# Altium PCB Atemgea_pcb.PcbDoc (part 1 of 2)
Units mm, origin at the board's own origin, x right, y up, seen from the top; angles counter-clockwise.
Board outline 68.58 x 53.34 mm, 2 copper layers (Top Layer, Bottom Layer); 105 components, 71 nets, 323 pads, 0 vias.
Unrouted connection lines stored in the file: 231.
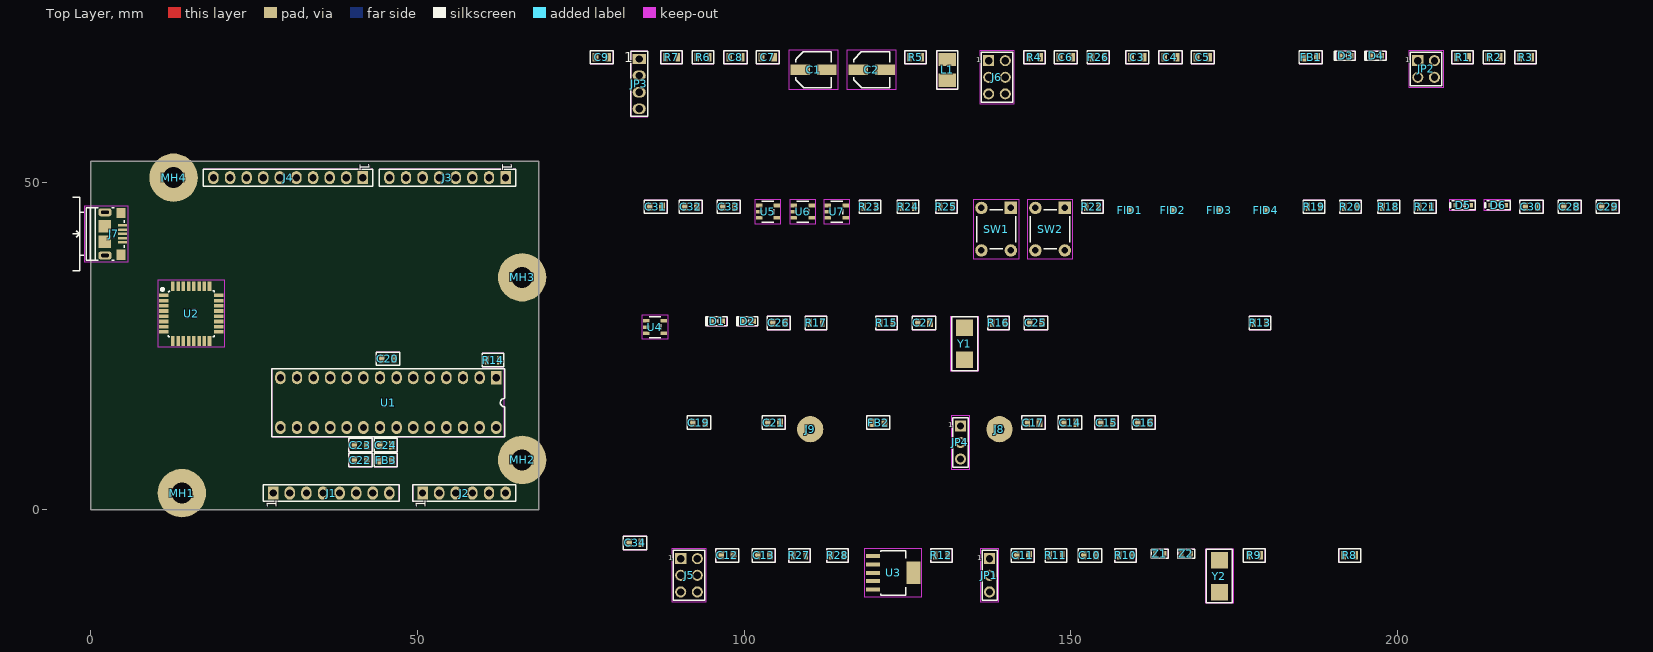
[diagram p0: Top Layer view]
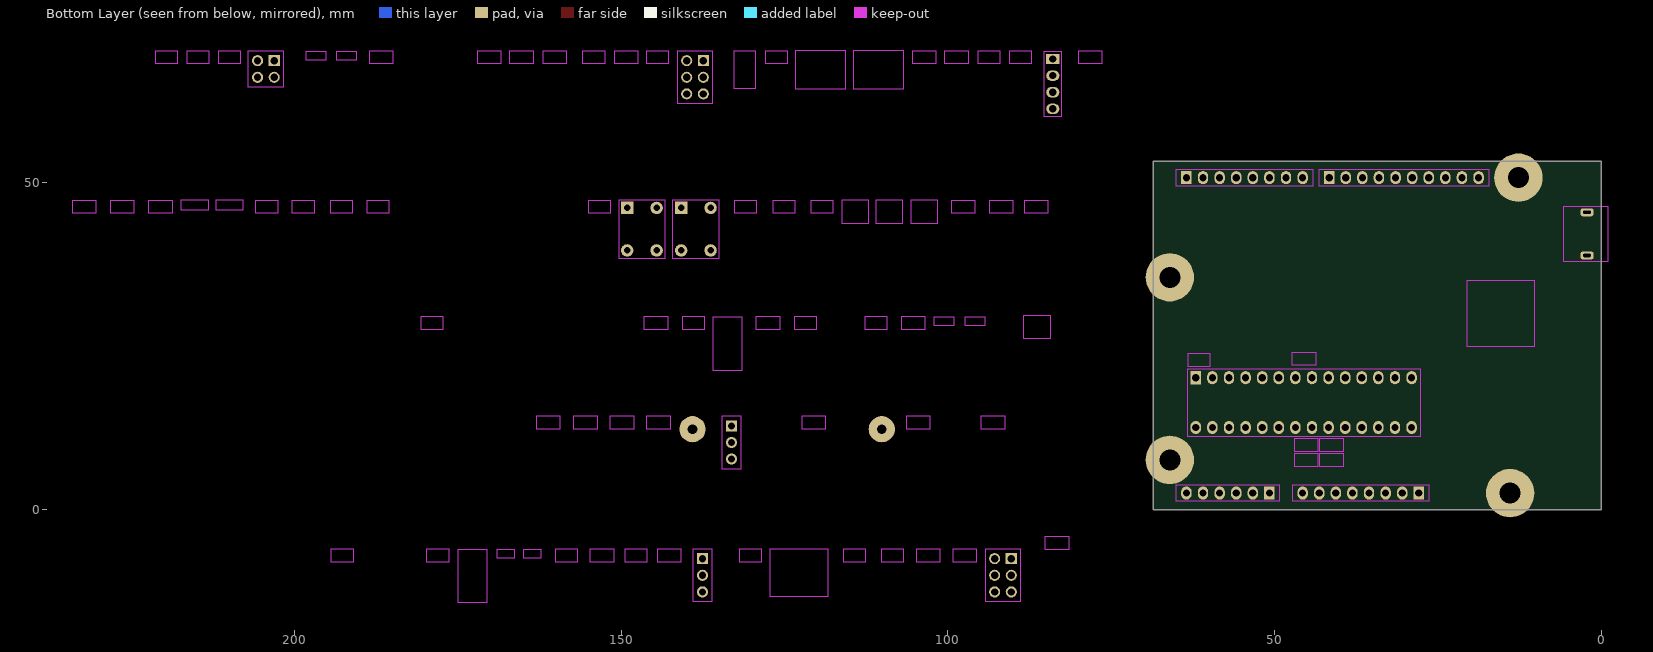
[diagram p1: Bottom Layer view, seen from below]

## Layer stack, top to bottom
Top Solder: solder mask 0.0102, Solder Resist, Dk 3.5
Top Layer: signal copper 0.0356
Dielectric 1: dielectric 0.32, FR-4, Dk 4.8
Bottom Layer: signal copper 0.0356
Bottom Solder: solder mask 0.0102, Solder Resist, Dk 3.5

## Board outline
0,0 68.58,0 68.58,53.34 0,53.34

## Design rules (kind name [scope] priority, off if disabled: settings)
Clearance [All] p1: gap=0.254 ignorepadtopadclearanceinfootprint=FALSE except(0: Arc-Hole Track-Hole SMDPad-Hole THPad-Hole Via-Hole Fill-Hole Poly-Hole Region-Hole Text-Hole)
PolygonConnect [All] p1: connectstyle=Relief reliefconductorwidth=0.254 reliefentries=4 polygonreliefangle="90 Angle" airgapwidth=0.254
RoutingVias [All] p1: holewidth=0.711 width=1.27 viastyle="Through Hole" minholewidth=0.711 minwidth=1.27 maxholewidth=0.711 maxwidth=1.27
SolderMaskExpansion [All] p1: expansion=0.102 istentingtop=FALSE
Width [All] p1: maxlimit=0.254 minlimit=0.254 preferedwidth=0.254
30 further rules are at their usual default settings.

## Components (designator, comment, footprint, x,y, rotation, side; value= is the part's Value field where it differs from the comment)
C1 "100uF" C_ALU_C_SIZE 110.617,67.31 r0 top
C2 "100uF" C_ALU_C_SIZE 119.507,67.31 r0 top
C3 "10uF" C0805 160.147,69.215 r0 top
C4 "100nF" C0805 165.227,69.215 r0 top
C5 "100nF" C0805 170.18,69.215 r0 top
C6 "100nF" C0805 149.225,69.215 r0 top
C7 "1uF" C0805 103.632,69.215 r0 top
C8 "100nF" C0805 98.679,69.215 r0 top
C9 "18pF" C0805 78.232,69.215 r0 top
C10 "18pF" C0805 152.908,-6.985 r0 top
C11 "100nF" C0805 142.621,-6.985 r0 top
C12 "10uF" C0805 97.409,-6.985 r0 top
C13 "10uF" C0805 102.997,-6.985 r0 top
C14 "100nF" C0805 149.86,13.335 r0 top
C15 "100nF" C0805 155.448,13.335 r0 top
C16 "100nF" C0805 161.163,13.335 r0 top
C17 "100nF" C0805 144.272,13.335 r0 top
C19 "10uF" C0805 93.091,13.335 r0 top
C20 "100nF" C0805 45.5,23.1 r0 top
C21 "10uF" C0805 104.521,13.335 r0 top
C22 "10uF" C0805 41.3,7.6 r0 top
C23 "10uF" C0805 41.3,9.9 r0 top
C24 "100nF" C0805 45.15,9.9 r180 top
C25 "18pF" C0805 144.653,28.575 r0 top
C26 "100nF" C0805 105.283,28.575 r0 top
C27 "18pF" C0805 127.508,28.575 r0 top
C28 "100nF" C0805 226.314,46.355 r0 top
C29 "100nF" C0805 232.156,46.355 r0 top
C30 "100nF" C0805 220.472,46.355 r0 top
C31 "100nF" C0805 86.487,46.355 r0 top
C32 "100nF" C0805 91.821,46.355 r0 top
C33 "100nF" C0805 97.663,46.355 r0 top
C34 "10uF" C0805 83.312,-5.08 r0 top
D1 "GREEN" LED0603 95.885,28.829 r0 top
D2 "Orange" LED0603 100.584,28.829 r0 top
D3 "Orange" LED0603 192.024,69.469 r0 top
D4 "Orange" LED0603 196.723,69.469 r0 top
D5 "BAT54HT1G" SOD323 210.058,46.609 r0 top
D6 "BAT54HT1G" SOD323 215.392,46.609 r0 top
FB1 "MPZ2012S601AT000" C0805 186.69,69.215 r0 top
FB2 "MPZ2012S601AT000" C0805 120.523,13.335 r0 top
FB3 "MPZ2012S601AT000" C0805 45.15,7.6 r180 top
FID1 "FID_1MM" FID_x_420 159.004,45.847 r0 top
FID2 "FID_1MM" FID_x_420 165.608,45.847 r90 top
FID3 "FID_1MM" FID_x_420 172.72,45.847 r90 top
FID4 "FID_1MM" FID_x_420 179.832,45.847 r90 top
J1 "HEADER_FEMALE_1x8_2.54MM" FEMALE_HEADER_1x8_2.54MM 27.94,2.54 r90 top locked
J2 "HEADER_FEMALE_1x6_2.54MM" FEMALE_HEADER_1x6_2.54MM 50.8,2.54 r90 top locked
J3 "HEADER_FEMALE_1x8_2.54MM" FEMALE_HEADER_1x8_2.54MM 63.5,50.8 r270 top locked
J4 "HEADER_FEMALE_1X10_2.54MM" FEMALE_HEADER_1x10_2.54MM 41.656,50.8 r270 top locked
J5 "67997-106HLF" HDR_2x3_2.54MM 90.297,-7.493 r0 top
J6 "67997-106HLF" HDR_2x3_2.54MM 137.414,68.707 r0 top
J7 "10118193-0001LF" 10118193-0001LF 3.538,42.2 r270 top
J8 "4MMx1.5MM" PAD_WITH_HOLE_4MM_1.5MM 139.065,12.319 r0 top
J9 "4MMx1.5MM" PAD_WITH_HOLE_4MM_1.5MM 110.109,12.319 r0 top
JP1 "HEADER_FEMALE_1x3" HDR_1x3_2.54MM 137.541,-7.493 r0 top
JP2 "HDR 2x2 2.54MM" HDR_2x2_2.54MM 203.073,68.707 r0 top
JP3 "HDR 1x4 2.54MM" MALEHEADER_1x4_2.54MM 83.947,68.961 r0 top
JP4 "HEADER_FEMALE_1x3" HDR_1x3_2.54MM 133.096,12.827 r0 top
L1 "2U2/2A" CL_inductor 131.064,67.31 r90 top
MH1 "Mounting_hole_17.4_3.2" MH_17.4_3.2 13.97,2.54 r0 top locked
MH2 "Mounting_hole_17.4_3.2" MH_17.4_3.2 66.04,7.62 r0 top locked
MH3 "Mounting_hole_17.4_3.2" MH_17.4_3.2 66.04,35.56 r0 top locked
MH4 "Mounting_hole_17.4_3.2" MH_17.4_3.2 12.7,50.8 r0 top locked
R1 "100K" R0805 209.931,69.215 r0 top
R2 "560" R0805 214.757,69.215 r0 top
R3 "560" R0805 219.583,69.215 r0 top
R4 "10K" R0805 144.399,69.215 r0 top
R5 "22" R0805 126.238,69.215 r0 top
R6 "22" R0805 93.726,69.215 r0 top
R7 "22" R0805 88.9,69.215 r0 top
R8 "0R" R0805 192.659,-6.985 r0 top
R9 "1M" R0805 178.054,-6.985 r0 top
R10 "1K" R0805 158.369,-6.985 r0 top
R11 "1K" R0805 147.701,-6.985 r0 top
R12 "1K" R0805 130.175,-6.985 r0 top
R13 "22" R0805 178.943,28.575 r0 top
R14 "10K" R0805 61.6,22.9 r0 top
R15 "560" R0805 121.793,28.575 r0 top
R16 "1M" R0805 138.938,28.575 r0 top
R17 "560" R0805 110.998,28.575 r0 top
R18 "10K" R0805 198.628,46.355 r0 top
R19 "10K" R0805 187.198,46.355 r0 top
R20 "10K" R0805 192.786,46.355 r0 top
R21 "10K" R0805 204.216,46.355 r0 top
R22 "560" R0805 153.289,46.355 r0 top
R23 "22" R0805 119.253,46.355 r0 top
R24 "22" R0805 125.095,46.355 r0 top
R25 "22" R0805 130.937,46.355 r0 top
R26 "0R" R0805 154.178,69.215 r0 top
R27 "0R" R0805 108.458,-6.985 r0 top
R28 "0R" R0805 114.3,-6.985 r0 top
SW1 "1825910-6" DIP41825910-6 138.557,42.926 r0 top
SW2 "1825910-6" DIP41825910-6 146.812,42.926 r0 top
U1 "ATMEGA328P-PU" DIP28_7.62mm 62.065,20.193 r270 top locked
U2 "ATMEGA16U2-AU" TQFP_32 15.4,30 r0 top locked
U3 "TL1963A-33DCQR" TL1963A-33DCQR 122.809,-9.652 r0 top
U4 "SN74AHC1G09DBVR" DBV_SOT_5 86.36,27.94 r0 top
U5 "SN74AHC1G09DBVR" DBV_SOT_5 103.632,45.593 r0 top
U6 "SN74AHC1G09DBVR" DBV_SOT_5 108.966,45.593 r0 top
U7 "SN74AHC1G09DBVR" DBV_SOT_5 114.173,45.593 r0 top
Y1 "ABM7-16.000MHZ-D2Y-T" ABM4_v1_1_BIG 133.731,25.4 r90 top
Y2 "ABM7-16.000MHZ-D2Y-T" ABM4_v1_1_BIG 172.72,-10.16 r90 top
Z1 "CG0603MLC-05E" R0603 163.576,-6.731 r0 top
Z2 "CG0603MLC-05E" R0603 167.64,-6.731 r0 top

## Footprints (in the part's own frame and the unit in brackets; to place one, negate y for a bottom-side part, rotate by r counter-clockwise, add the part's x,y. Pads: shape width x height; smd on the part's side, far side on the other; paste and mask are expansions set on the pad)
10118193-0001LF [mm]
  rect 0.4x1.35 smd mask+0.05: 1(-1.3,1.338) 2(-0.65,1.338) 3(0,1.338) 4(0.65,1.338) 5(1.3,1.338)
  rect 1.6x1.4 smd: 6(-3.2,1.112) 7(3.2,1.112)
  rrect60% 1.2x2 hole 0.5 slot 1.2 at 90 deg mask+0.05: 8(-3.3,-1.338) 9(3.3,-1.338)
  rect 1.9x1.9 smd: 10(-1.2,-1.338) 11(1.2,-1.338)
  Keep-Out Layer region: -4.25,-4.5 4.25,-4.5 4.25,2.25 -4.25,2.25
  silkscreen extent -5.6,-6.3 5.6,1.6, body extent -3.93,-4.2 3.93,1.58, height 2.88
ABM4_v1_1_BIG [mm]
  rect 2.5x2.6 smd: 1(-2.45,0) 2(2.45,0)
  Keep-Out Layer region: -4.101,-2.2 4.099,-2.2 4.099,2.2 -4.101,2.2
  silkscreen extent -4.1,-2 4.1,2, body extent -3.1,-1.85 3.1,1.85, height 1.41
C0805 [mm]
  rect 0.9x1.3 smd: 1(-0.95,0) 2(0.95,0)
  Keep-Out Layer region: -1.778,-1.016 1.778,-1.016 1.778,1.016 -1.778,1.016
  silkscreen extent -1.78,-1.02 1.78,1.02, body extent -1.15,-0.51 1.15,0.49, height 1.53
C_ALU_C_SIZE [mm]
  rect 3x1.6 smd: 1(-2.05,0) 2(2.05,0)
  Keep-Out Layer region: -3.8,-3 3.8,-3 3.8,3 -3.8,3
  silkscreen extent -2.75,-2.75 2.75,2.75, body extent -2.92,-2.62 2.98,2.68, height 5.41
CL_inductor [mm]
  rect 2x2.7 smd: 1(-1.6,0) 2(1.6,0)
  Keep-Out Layer region: -2.9,-1.6 2.9,-1.6 2.9,1.6 -2.9,1.6
  silkscreen extent -2.95,-1.6 2.9,1.6, body extent -1.7,-1.25 1.7,1.25, height 2.7
DBV_SOT_5 [mm]
  rect 1x0.55 smd: 1(-1.35,0.95) 2(-1.35,0) 3(-1.35,-0.95) 4(1.35,-0.95) 5(1.35,0.95)
  Keep-Out Layer region: -2,-1.8 2,-1.8 2,1.8 -2,1.8
  silkscreen extent -0.9,-1.6 0.9,1.6, body extent -1.53,-1.53 1.5,1.53, height 1.6
DIP28_7.62mm [mm]
  rect 2x1.6 hole 1.1: 1(0,0)
  oval 2x1.6 hole 1.1: 2(0,-2.54) 3(0,-5.08) 4(0,-7.62) 5(0,-10.16) 6(0,-12.7) 7(0,-15.24) 8(0,-17.78) 9(0,-20.32) 10(0,-22.86) 11(0,-25.4) 12(0,-27.94) 13(0,-30.48) 14(0,-33.02) 15(7.62,-33.02) 16(7.62,-30.48) 17(7.62,-27.94) 18(7.62,-25.4) 19(7.62,-22.86) 20(7.62,-20.32) 21(7.62,-17.78) 22(7.62,-15.24) 23(7.62,-12.7) 24(7.62,-10.16) 25(7.62,-7.62) 26(7.62,-5.08) 27(7.62,-2.54) 28(7.62,0)
  Keep-Out Layer region: -1.382,-34.31 9.01,-34.31 9.01,1.231 -1.382,1.231
  silkscreen extent -1.39,-34.31 9.01,1.27, body extent -0.06,-34.21 7.81,1.19, height 5.2
DIP41825910-6 [mm]
  rect 1.9x1.9 hole 1: 1(2.25,3.25)
  round 1.9 hole 1: 2(2.25,-3.25) 3(-2.25,3.25) 4(-2.25,-3.25)
  Keep-Out Layer region: -3.5,-4.5 3.5,-4.5 3.5,4.5 -3.5,4.5
  silkscreen extent -3,-3 3,3, body extent -3,-3.9 3,3.9, height 5
FEMALE_HEADER_1x6_2.54MM [mm]
  rect 2x1.6 hole 1.1: 1(0,0)
  oval 2x1.6 hole 1.1: 2(0,-2.54) 3(0,-5.08) 4(0,-7.62) 5(0,-10.16) 6(0,-12.7)
  Keep-Out Layer region: -1.27,-14.224 1.27,-14.224 1.27,1.524 -1.27,1.524
  silkscreen extent -1.27,-14.22 1.27,1.52, body extent -1.25,-14.17 1.25,1.47, height 8.61
FEMALE_HEADER_1x8_2.54MM [mm]
  rect 2x1.6 hole 1.1: 1(0,0)
  oval 2x1.6 hole 1.1: 2(0,-2.54) 3(0,-5.08) 4(0,-7.62) 5(0,-10.16) 6(0,-12.7) 7(0,-15.24) 8(0,-17.78)
  Keep-Out Layer region: -1.27,-19.304 1.27,-19.304 1.27,1.524 -1.27,1.524
  silkscreen extent -1.27,-19.3 1.27,1.52, body extent -1.25,-19.3 1.25,1.42, height 8.61
FEMALE_HEADER_1x10_2.54MM [mm]
  rect 2x1.6 hole 1.1: 1(0,0)
  oval 2x1.6 hole 1.1: 2(0,-2.54) 3(0,-5.08) 4(0,-7.62) 5(0,-10.16) 6(0,-12.7) 7(0,-15.24) 8(0,-17.78) 9(0,-20.32) 10(0,-22.86)
  Keep-Out Layer region: -1.27,-24.384 1.27,-24.384 1.27,1.524 -1.27,1.524
  silkscreen extent -1.27,-24.38 1.27,1.52, body extent -1.23,-24.33 1.27,1.47, height 8.59
FID_x_420 [mil]
  round 40 smd paste-40 mask+40: 1(0,0)
HDR_1x3_2.54MM [mm]
  rect 1.7x1.7 hole 1.1: 1(0,0)
  round 1.7 hole 1.1: 2(0,-2.54) 3(0,-5.08)
  Keep-Out Layer region: -1.397,-6.604 1.4,-6.604 1.4,1.524 -1.397,1.524
  silkscreen extent -1.14,-6.35 1.2,1.27, body extent -1.2,-6.11 1.21,1.11, height 8.19
HDR_2x2_2.54MM [mm]
  rect 1.7x1.7 hole 1.1: 1(0,0)
  round 1.7 hole 1.1: 2(2.54,0) 3(0,-2.54) 4(2.54,-2.54)
  Keep-Out Layer region: -1.397,-4.064 3.937,-4.064 3.937,1.524 -1.397,1.524
  silkscreen extent -1.14,-3.81 3.68,1.27, body extent -1.4,-3.77 3.68,1.23, height 7.5
HDR_2x3_2.54MM [mm]
  rect 1.7x1.7 hole 1.1: 1(0,0)
  round 1.7 hole 1.1: 2(2.54,0) 3(0,-2.54) 4(2.54,-2.54) 5(0,-5.08) 6(2.54,-5.08)
  Keep-Out Layer region: -1.397,-6.604 3.937,-6.604 3.937,1.524 -1.397,1.524
  silkscreen extent -1.14,-6.35 3.68,1.27, body extent -1.27,-6.35 3.81,1.27, height 8.45
LED0603 [mm]
  rect 0.8x0.8 smd: 1(-0.8,0) 2(0.8,0)
  Keep-Out Layer region: -1.5,-0.7 1.475,-0.7 1.475,0.7 -1.5,0.7
  silkscreen extent -1.75,-0.7 1.5,0.7, body extent -0.85,-0.4 0.85,0.4, height 0.65
MALEHEADER_1x4_2.54MM [mm]
  rect 2x1.6 hole 1.1: 1(0,0)
  oval 2x1.6 hole 1.1: 2(0,-2.54) 3(0,-5.08) 4(0,-7.62)
  Keep-Out Layer region: -1.27,-8.8 1.27,-8.8 1.27,1.2 -1.27,1.2
  silkscreen extent -1.27,-8.72 1.27,1.2, body extent -1.21,-8.66 1.2,1.1, height 8.19
MH_17.4_3.2 [mm]
  round 7.4 hole 3.2: 1(0,0)
PAD_WITH_HOLE_4MM_1.5MM [mm]
  round 4 hole 1.5: 1(0,0)
R0603 [mm]
  rect 0.6x0.9 smd: 1(-0.75,0) 2(0.75,0)
  Keep-Out Layer region: -1.3,-0.7 1.3,-0.7 1.3,0.7 -1.3,0.7
  silkscreen extent -1.3,-0.7 1.3,0.7, body extent -0.79,-0.42 0.81,0.42, height 0.81
R0805 [mm]
  rect 0.7x1.3 smd: 1(-0.95,0) 2(0.95,0)
  Keep-Out Layer region: -1.651,-1.016 1.651,-1.016 1.651,1.016 -1.651,1.016
  silkscreen extent -1.65,-1.02 1.65,1.02, body extent -1,-0.6 1,0.6, height 0.7
SOD323 [mil]
  rect 22x27 smd: 1(-48,0) 2(48,0)
  Keep-Out Layer region: -86.61,-31.5 74.8,-31.5 74.8,31.5 -86.61,31.5
  silkscreen extent -79,-28 71,28, body extent -49,-25 49,25, height 35
TL1963A-33DCQR [mm]
  rect 2.2x0.6 smd: 1(-3.1,2.54) 2(-3.1,1.27) 3(-3.1,0) 4(-3.1,-1.27) 5(-3.1,-2.54)
  rect 2.2x3.5 smd: 6(3.1,0)
  Keep-Out Layer region: -4.4,-3.7 4.4,-3.7 4.4,3.7 -4.4,3.7
  silkscreen extent -1.9,-3.4 1.9,3.4, body extent -3.66,-3.27 3.6,3.27, height 1.71
TQFP_32 [mm]
  rect 1.5x0.55 smd mask+0.06: 1(-4.2,2.8) 2(-4.2,2) 3(-4.2,1.2) 4(-4.2,0.4) 5(-4.2,-0.4) 6(-4.2,-1.2) 7(-4.2,-2) 8(-4.2,-2.8) 17(4.2,-2.8) 18(4.2,-2) 19(4.2,-1.2) 20(4.2,-0.4) 21(4.2,0.4) 22(4.2,1.2) 23(4.2,2) 24(4.2,2.8)
  rect 0.55x1.5 smd mask+0.06: 9(-2.8,-4.2) 10(-2,-4.2) 11(-1.2,-4.2) 12(-0.4,-4.2) 13(0.4,-4.2) 14(1.2,-4.2) 15(2,-4.2) 16(2.8,-4.2) 25(2.8,4.2) 26(2,4.2) 27(1.2,4.2) 28(0.4,4.2) 29(-0.4,4.2) 30(-1.2,4.2) 31(-2,4.2) 32(-2.8,4.2)
  Keep-Out Layer region: -5.1,-5.1 5.1,-5.1 5.1,5.1 -5.1,5.1
  silkscreen extent -4.54,-3.5 3.5,3.84, body extent -4.6,-4.6 4.6,4.6, height 1.2

## Part data
C1 C2: library part EEE-1AA101WR, "Cap Aluminum 100uF 10V 20% (5 X 5.4mm) SMD 50mA 1000 hr 85°C T/R", Case/Package=Radial, Manufacturer=Panasonic, Max Operating Temperature=85°C, Min Operating Temperature=-40°C, Package Quantity=1, Ripple Current=50mA, Supplier Part Number 1=1763738, Tolerance=20%, Voltage Rating=10V, Capacitance=100uF, Category="Aluminum Electrolytic Capacitors", ComponentLink1Description=https://datasheet.ciiva.com/26945/getdatasheetpartid-169213-26945071.pdf?src-supplier=Verical, ComponentLink1URL=https://datasheet.ciiva.com/26945/getdatasheetpartid-169213-26945071.pdf?src-supplier=Verical, ComponentLink2Description=https://datasheet.ciiva.com/24027/aba0000ce2-40801-24027541.pdf?src-supplier=Mouser, ComponentLink2URL=https://datasheet.ciiva.com/24027/aba0000ce2-40801-24027541.pdf?src-supplier=Mouser, ComponentLink3Description=https://datasheet.ciiva.com/14598/70255710-14598233.pdf?src-supplier=Allied+Electronics, ComponentLink3URL=https://datasheet.ciiva.com/14598/70255710-14598233.pdf?src-supplier=Allied+Electronics, ComponentLink4Description=https://datasheet.ciiva.com/14605/70255710-14605689.pdf?src-supplier=Allied+Electronics, ComponentLink4URL=https://datasheet.ciiva.com/14605/70255710-14605689.pdf?src-supplier=Allied+Electronics, ComponentLink5Description=https://datasheet.ciiva.com/11673/aba0000ce2-11673882.pdf?src-supplier=Avnet, ComponentLink5URL=https://datasheet.ciiva.com/11673/aba0000ce2-11673882.pdf?src-supplier=Avnet, ComponentLink6Description=https://datasheet.ciiva.com/16427/aba0000ce2-16427544.pdf?src-supplier=Future+Electronics, ComponentLink6URL=https://datasheet.ciiva.com/16427/aba0000ce2-16427544.pdf?src-supplier=Future+Electronics, ComponentLink7Description=https://datasheet.ciiva.com/2983/aba0000ce2-2983906.pdf?src-supplier=Avnet, ComponentLink7URL=https://datasheet.ciiva.com/2983/aba0000ce2-2983906.pdf?src-supplier=Avnet, ComponentLink8Description=https://datasheet.ciiva.com/30075/11aba0000ce2-30075303.pdf?src-supplier=Onlinecomponents.com, ComponentLink8URL=https://datasheet.ciiva.com/30075/11aba0000ce2-30075303.pdf?src-supplier=Onlinecomponents.com, Construction=Cylindrical, Contact Plating=Tin, Diameter=5mm, Height=5.4mm, Height - Seated (Max)=0.213inch, Lead Free="Lead Free", Length=5.5mm, Life (Hours)=1000Hour, Manufacturer Part Number=EEE-1AA101WR, Mount="Surface Mount,PCB", Packaging="Tape and Reel", Pricing 1="1000=0.07800, 3000=0.07400 (USD)", Radiation Hardening=No, REACH SVHC=Unknown, Ripple Current (AC)=50mA, RoHS=Yes, RoHS Compliant=Yes, Series=S, Stock 1=1, Supplier 1=RSComponents, Termination=SMD/SMT, Voltage Rating (DC)=10V
C3 C12 C13 C19 C21 C22 C23 C34: library part CGA4J3X7S1A106M125AB, "Cap Ceramic 10uF 10V X7S 20% Pad SMD 0805 125°C Low ESR Automotive T/R", Case Code (Imperial)=0805, Case Code (Metric)=2012, Dielectric=X7S, Manufacturer=TDK, Max Operating Temperature=125°C, Min Operating Temperature=-55°C, Package Quantity=2000, Ratings=AEC-Q200, Supplier Part Number 1=445-16115-1-ND, Tolerance=20%, Voltage Rating=10V, Capacitance=10uF, Case/Package=0805, Category="Ceramic Capacitors", ComponentLink1Description=http://www.mouser.com/ds/2/400/lcc_automotive_general_en-843974.pdf?src-supplier=Mouser, ComponentLink1URL=http://www.mouser.com/ds/2/400/lcc_automotive_general_en-843974.pdf?src-supplier=Mouser, ComponentLink2Description=https://product.tdk.com/info/en/documents/chara_sheet/CGA4J3X7S1A106M125AB.pdf?src-supplier=Digi-Key, ComponentLink2URL=https://product.tdk.com/info/en/documents/chara_sheet/CGA4J3X7S1A106M125AB.pdf?src-supplier=Digi-Key, Height=1.25mm, Length=0.079inch, Manufacturer Part Number=CGA4J3X7S1A106M125AB, Mount="Surface Mount", Packaging="Tape and Reel", Pricing 1="1=0.45000, 10=0.31600, 50=0.23880, 100=0.20790, 500=0.15400, 1000=0.13090 (USD)", RoHS=Yes, RoHS Compliant=Yes, Stock 1=10, Supplier 1=Digi-Key, Termination=SMD/SMT, Thickness=0.057inch, Voltage Rating (DC)=10V, Weight=0.000194oz, Width=1.25mm
C4 C5 C6 C8 C11 C14 C15 C16 C17 C20 C24 C26 C28 C29 C30 C31 C32 C33: library part CGA4J2X7R1H104K125AM, "Cap Ceramic 0.1uF 50V X7R 10% Pad SMD 0805 125°C Automotive T/R", Case Code (Imperial)=0805, Case Code (Metric)=2012, Dielectric=X7R, Manufacturer=TDK, Max Operating Temperature=125°C, Min Operating Temperature=-55°C, Package Quantity=1, Ratings=AEC-Q200, Resistor Type=Ceramic, Supplier Part Number 1=445-6958-1-ND, Tolerance=10%, Voltage Rating=50V, Capacitance=100nF, Case/Package=0805, Category="Ceramic Capacitors", ComponentLink1Description=http://components.arrow.com/part/dataview/0323_06888403?src-supplier=Arrow+Europe, ComponentLink1URL=http://components.arrow.com/part/dataview/0323_06888403?src-supplier=Arrow+Europe, ComponentLink2Description=https://product.tdk.com/info/en/catalog/datasheets/mlcc_automotive_openmode_en.pdf?src-supplier=Digi-Key, ComponentLink2URL=https://product.tdk.com/info/en/catalog/datasheets/mlcc_automotive_openmode_en.pdf?src-supplier=Digi-Key, ComponentLink3Description=https://product.tdk.com/info/en/documents/chara_sheet/CGA4J2X7R1H104K125AM.pdf?src-supplier=Digi-Key, ComponentLink3URL=https://product.tdk.com/info/en/documents/chara_sheet/CGA4J2X7R1H104K125AM.pdf?src-supplier=Digi-Key, ComponentLink4Description=http://components.arrow.com/part/dataview/57437351S460182N1165?src-supplier=Arrow+Electronics, ComponentLink4URL=http://components.arrow.com/part/dataview/57437351S460182N1165?src-supplier=Arrow+Electronics, Depth=1.25mm, Features="Soft Termination", Height=1.25mm, Length=0.079inch, Manufacturer Part Number=CGA4J2X7R1H104K125AM, Mount="Surface Mount", Packaging="Tape and Reel", Pricing 1="1=0.20000, 10=0.14200, 50=0.08080, 100=0.06700, 500=0.04696, 1000=0.03888 (USD)", RoHS=Yes, RoHS Compliant=Yes, Series=CGA, Stock 1=4940, Supplier 1=Digi-Key, Termination=SMD/SMT, Thickness=0.057inch, Voltage Rating (DC)=50V, Weight=0.000194oz, Width=0.049inch
C7: library part C2012X5R1E105K125AA, "TDK - C2012X5R1E105K125AA - SMD Multilayer Ceramic Capacitor, 1 µF, 25 V, 0805 [2012 Metric], ± 10%, X5R, C Series", Case Code (Imperial)=0805, Case Code (Metric)=2012, Dielectric=X5R, Dielectric Material=Ceramic, Manufacturer=TDK, Max Operating Temperature=85°C, Min Operating Temperature=-55°C, Package Quantity=2000, Supplier Part Number 1=445-1419-1-ND, Tolerance=10%, Voltage=25V, Capacitance=1uF, Case/Package=0805, Category="Ceramic Capacitors", ComponentLink1Description=https://datasheet.ciiva.com/11787/0900766b80c1bb00-11787608.pdf?src-supplier=RSComponents, ComponentLink1URL=https://datasheet.ciiva.com/11787/0900766b80c1bb00-11787608.pdf?src-supplier=RSComponents, ComponentLink2Description=https://datasheet.ciiva.com/16449/e412-c-16449595.pdf?src-supplier=Future+Electronics, ComponentLink2URL=https://datasheet.ciiva.com/16449/e412-c-16449595.pdf?src-supplier=Future+Electronics, ComponentLink3Description=https://datasheet.ciiva.com/28602/1744655-28602171.pdf?src-supplier=Element14, ComponentLink3URL=https://datasheet.ciiva.com/28602/1744655-28602171.pdf?src-supplier=Element14, ComponentLink4Description=https://datasheet.ciiva.com/15192/getdatasheetpartid-726707-15192140.pdf?src-supplier=Verical, ComponentLink4URL=https://datasheet.ciiva.com/15192/getdatasheetpartid-726707-15192140.pdf?src-supplier=Verical, Construction=Flat, Depth=1.25mm, Height=1.25mm, Lead Free="Lead Free", Length=2mm, Manufacturer Part Number=C2012X5R1E105K125AA, Mount="Surface Mount", Number of Pins=2, Packaging="Tape and Reel", Pricing 1="1=0.23000, 10=0.15800, 50=0.09500, 100=0.08030, 500=0.05492, 1000=0.04858 (USD)", Radiation Hardening=No, REACH SVHC="No SVHC", Resistor Type=Ceramic, RoHS=Yes, RoHS Compliant=Yes, Series=C, Stock 1=32247, Supplier 1=Digi-Key, Termination=SMD/SMT, Thickness=0.057inch, Voltage Rating=25V, Voltage Rating (DC)=25V, Weight=0.000194oz, Width=0.049inch
C9 C10 C25 C27: library part C0805C180J5GACTU, "Cap Ceramic 18pF 50V C0G 5% SMD 0805 125C Paper T/R", Case Code (Imperial)=0805, Case Code (Metric)=2012, Dielectric=C0G, Dielectric Material=Ceramic, Manufacturer=KEMET, Max Operating Temperature=125°C, Min Operating Temperature=-55°C, Package Quantity=1, Supplier Part Number 1=399-C0805C180J5GAC7800CT-ND, Temperature Coefficient=30ppm/°C, Tolerance=5%, Voltage=50V, Capacitance=18pF, Case/Package=0805, Category="Ceramic Capacitors", ComponentLink1Description=https://datasheet.ciiva.com/22746/1769375-22746770.pdf?src-supplier=Element14, ComponentLink1URL=https://datasheet.ciiva.com/22746/1769375-22746770.pdf?src-supplier=Element14, ComponentLink2Description=https://datasheet.ciiva.com/26923/getdatasheetpartid-759702-26923980.pdf?src-supplier=Verical, ComponentLink2URL=https://datasheet.ciiva.com/26923/getdatasheetpartid-759702-26923980.pdf?src-supplier=Verical, ComponentLink3Description=https://datasheet.ciiva.com/26847/getdatasheetpartid-385668-26847862.pdf?src-supplier=Verical, ComponentLink3URL=https://datasheet.ciiva.com/26847/getdatasheetpartid-385668-26847862.pdf?src-supplier=Verical, Construction=Flat, Contact Material=Tin, Contact Plating=Tin,Matte, Depth=1.25mm, Dissipation Factor=0.1%, Height=0.78mm, Lead Free="Lead Free", Lead Pitch=0.75mm, Length=2mm, Manufacturer Part Number=C0805C180J5GACTU, Mount="Surface Mount,PCB", Number of Pins=2, Packaging="Tape and Reel", Pricing 1="1=0.12000, 10=0.08600, 50=0.04900, 100=0.04070, 500=0.02852, 1000=0.02361 (USD)", Radiation Hardening=No, REACH SVHC="No SVHC", RoHS=Yes, RoHS Compliant=Yes, Series=C, Stock 1=100835, Supplier 1=Digi-Key, Termination=SMD/SMT, Thickness=0.035inch, Voltage Rating=50V, Voltage Rating (DC)=50V, Width=1.2mm
D1: library part LGL29K-G2J1-24-Z, "LED Single Chip Green 570nm 20mA 2-Pin 0603 T/R", Case Code (Imperial)=0603, Case Code (Metric)=1608, Color=Green, Forward Current=20mA, Forward Voltage=2.2V, Lens Color=White, Manufacturer="Osram Opto", Max Operating Temperature=100°C, Min Operating Temperature=-40°C, Package Quantity=5000, Reverse Voltage=12V, Supplier Part Number 1=LGL29K-G2J1-24-Z-299157-OSRAMOPTO, Test Current=2mA, Case/Package=0603, Category=LEDs, ComponentLink1Description=https://datasheet.ciiva.com/4689/g-l29k-39844-4689584.pdf?src-supplier=Mouser, ComponentLink1URL=https://datasheet.ciiva.com/4689/g-l29k-39844-4689584.pdf?src-supplier=Mouser, ComponentLink2Description=https://datasheet.ciiva.com/15198/getdatasheetpartid-571127-15198411.pdf?src-supplier=Verical, ComponentLink2URL=https://datasheet.ciiva.com/15198/getdatasheetpartid-571127-15198411.pdf?src-supplier=Verical, ComponentLink3Description=https://datasheet.ciiva.com/2112/00077107-0-2112887.pdf?src-supplier=Digi-Key, ComponentLink3URL=https://datasheet.ciiva.com/2112/00077107-0-2112887.pdf?src-supplier=Digi-Key, ComponentLink4Description=https://datasheet.ciiva.com/2112/00077107-0-2112886.pdf?src-supplier=Digi-Key, ComponentLink4URL=https://datasheet.ciiva.com/2112/00077107-0-2112886.pdf?src-supplier=Digi-Key, ComponentLink5Description=https://datasheet.ciiva.com/2112/00077107-0-2112888.pdf?src-supplier=Digi-Key, ComponentLink5URL=https://datasheet.ciiva.com/2112/00077107-0-2112888.pdf?src-supplier=Digi-Key, Depth=0.8mm, Dominant Wavelength=570nm, Height=0.65mm, Illumination Color=Green, Length=1.3mm, Lens Size=0.8mm, Lens Style=Flat,Diffused,Colorless,Rectangular, Lens Transparency=Diffused, Luminous Flux=0.012lm, Luminous Intensity=5.6mcd, Manufacturer Part Number=LGL29K-G2J1-24-Z, Mount="Surface Mount", Number of Elements=1, Number of LEDs=1, Number of Pins=2, Packaging="Tape and Reel", Radiation Hardening=No, RoHS=Yes, RoHS Compliant=Yes, Series=SmartLED, Stock 1=60000, Supplier 1="Bison Technologies", Viewing Angle=160°, Width=0.8mm
D2 D3 D4: library part LOL29K-H2K1-24-Z, "Smartled Orange Lc", Case Code (Imperial)=0603, Case Code (Metric)=1608, Forward Current=20mA, Forward Voltage=2.2V, Lens Color=White, Manufacturer="Osram Opto", Max Operating Temperature=100°C, Min Operating Temperature=-40°C, Package Quantity=5000, Reverse Voltage=12V, Supplier Part Number 1="LO L29K-H2K1-24-Z", Test Current=2mA, Case/Package=0603, Category=Uncategorized, Color=Orange, ComponentLink1Description=https://datasheet.ciiva.com/2112/00077105-0-2112905.pdf?src-supplier=Digi-Key, ComponentLink1URL=https://datasheet.ciiva.com/2112/00077105-0-2112905.pdf?src-supplier=Digi-Key, ComponentLink2Description=https://datasheet.ciiva.com/2112/00077105-0-2112904.pdf?src-supplier=Digi-Key, ComponentLink2URL=https://datasheet.ciiva.com/2112/00077105-0-2112904.pdf?src-supplier=Digi-Key, ComponentLink3Description=https://datasheet.ciiva.com/2112/00077105-0-2112906.pdf?src-supplier=Digi-Key, ComponentLink3URL=https://datasheet.ciiva.com/2112/00077105-0-2112906.pdf?src-supplier=Digi-Key, ComponentLink4Description=https://datasheet.ciiva.com/15198/getdatasheetpartid-693885-15198412.pdf?src-supplier=Verical, ComponentLink4URL=https://datasheet.ciiva.com/15198/getdatasheetpartid-693885-15198412.pdf?src-supplier=Verical, Depth=0.8mm, Dominant Wavelength=606nm, Height=0.65mm, Illumination Color=Orange, Length=1.3mm, Lens Size=0.8mm, Lens Style=Flat,Diffused,Colorless,Rectangular, Lens Transparency=Diffused, Luminous Flux=0.025lm, Luminous Intensity=9mcd, Manufacturer Part Number=LOL29K-H2K1-24-Z, Mount="Surface Mount", Number of Elements=1, Number of LEDs=1, Number of Pins=2, Packaging="Tape and Reel", Radiation Hardening=No, RoHS=Yes, RoHS Compliant=Yes, Series=SmartLED, Supplier 1="Arrow Electronics", Viewing Angle=160°, Width=0.8mm
D5 D6: "Small Signal Schottky Diode, Single, 30 V, 200 Ma, 800 Mv, 600 Ma, 150 C", Average Rectified Current=200mA, Capacitance=10pF, Forward Voltage=800mV, Manufacturer="ON Semiconductor / Fairchild", Max Forward Surge Current (Ifsm)=600mA, Max Operating Temperature=150°C, Max Repetitive Reverse Voltage (Vrrm)=30V, Max Reverse Current=2uA, Min Operating Temperature=-55°C, Package Quantity=3000, Power Dissipation=200mW, Supplier Part Number 1=BAT54HT1GOSDKR-ND, Category="Schottky Diodes", ComponentLink1Description=https://datasheet.ciiva.com/4714/bat54ht1-d-72881-4714706.pdf?src-supplier=Mouser, ComponentLink1URL=https://datasheet.ciiva.com/4714/bat54ht1-d-72881-4714706.pdf?src-supplier=Mouser, ComponentLink2Description=https://datasheet.ciiva.com/4452/bat54ht1g-104602-4452889.pdf?src-supplier=Mouser, ComponentLink2URL=https://datasheet.ciiva.com/4452/bat54ht1g-104602-4452889.pdf?src-supplier=Mouser, ComponentLink3Description=https://datasheet.ciiva.com/30479/0900766b811a63a9-30479442.pdf?src-supplier=RSComponents, ComponentLink3URL=https://datasheet.ciiva.com/30479/0900766b811a63a9-30479442.pdf?src-supplier=RSComponents, ComponentLink4Description=https://datasheet.ciiva.com/34301/806549-34301562.pdf?src-supplier=Jameco, ComponentLink4URL=https://datasheet.ciiva.com/34301/806549-34301562.pdf?src-supplier=Jameco, ComponentLink5Description=https://datasheet.ciiva.com/1240/1747983-1240762.pdf?src-supplier=Newark, ComponentLink5URL=https://datasheet.ciiva.com/1240/1747983-1240762.pdf?src-supplier=Newark, ComponentLink6Description=https://datasheet.ciiva.com/915/bat54ht1-d-915445.pdf?src-supplier=Digi-Key, ComponentLink6URL=https://datasheet.ciiva.com/915/bat54ht1-d-915445.pdf?src-supplier=Digi-Key, ComponentLink7Description=https://datasheet.ciiva.com/915/bat54ht1-d-915444.pdf?src-supplier=Digi-Key, ComponentLink7URL=https://datasheet.ciiva.com/915/bat54ht1-d-915444.pdf?src-supplier=Digi-Key, ComponentLink8Description=https://datasheet.ciiva.com/910/bat54ht1g-910499.pdf?src-supplier=Digi-Key, ComponentLink8URL=https://datasheet.ciiva.com/910/bat54ht1g-910499.pdf?src-supplier=Digi-Key, ComponentLink9Description=https://datasheet.ciiva.com/910/bat54ht1g-910498.pdf?src-supplier=Digi-Key, ComponentLink9URL=https://datasheet.ciiva.com/910/bat54ht1g-910498.pdf?src-supplier=Digi-Key, ComponentLink10Description=https://datasheet.ciiva.com/8294/bat54ht1-d-8294645.pdf?src-supplier=Avnet, ComponentLink10URL=https://datasheet.ciiva.com/8294/bat54ht1-d-8294645.pdf?src-supplier=Avnet, ComponentLink11Description=https://datasheet.ciiva.com/910/bat54ht1g-910497.pdf?src-supplier=Digi-Key, ComponentLink11URL=https://datasheet.ciiva.com/910/bat54ht1g-910497.pdf?src-supplier=Digi-Key, ComponentLink12Description=https://datasheet.ciiva.com/8303/bat54ht1g-8303645.pdf?src-supplier=Avnet, ComponentLink12URL=https://datasheet.ciiva.com/8303/bat54ht1g-8303645.pdf?src-supplier=Avnet, ComponentLink13Description=https://datasheet.ciiva.com/915/bat54ht1-d-915443.pdf?src-supplier=Digi-Key, ComponentLink13URL=https://datasheet.ciiva.com/915/bat54ht1-d-915443.pdf?src-supplier=Digi-Key, ComponentLink14Description=https://datasheet.ciiva.com/46429/1727620-46429206.pdf?src-supplier=Element14, ComponentLink14URL=https://datasheet.ciiva.com/46429/1727620-46429206.pdf?src-supplier=Element14, ComponentLink15Description=https://datasheet.ciiva.com/1180/bat54ht1-d-1180252.pdf?src-supplier=Element14, ComponentLink15URL=https://datasheet.ciiva.com/1180/bat54ht1-d-1180252.pdf?src-supplier=Element14, ComponentLink16Description=https://datasheet.ciiva.com/1180/bat54ht1-d-1180251.pdf?src-supplier=Element14, ComponentLink16URL=https://datasheet.ciiva.com/1180/bat54ht1-d-1180251.pdf?src-supplier=Element14, ComponentLink17Description=https://datasheet.ciiva.com/17020/bat54ht1g-17020445.pdf?src-supplier=Future+Electronics, ComponentLink17URL=https://datasheet.ciiva.com/17020/bat54ht1g-17020445.pdf?src-supplier=Future+Electronics, ComponentLink18Description=https://datasheet.ciiva.com/48686/001262925-da-01-en-diode-schottky-30v-bat54ht1g-sod-323-fsc-48686266.pdf?src-supplier=Conrad, ComponentLink18URL=https://datasheet.ciiva.com/48686/001262925-da-01-en-diode-schottky-30v-bat54ht1g-sod-323-fsc-48686266.pdf?src-supplier=Conrad, Contact Plating=Tin,Matte, Current Rating=200mA, Element Configuration=Single, Forward Current=200mA, Height=1mm, Lead Free="Lead Free", Length=1.8mm, Manufacturer Part Number=BAT54HT1G, Max Reverse Leakage Current=2uA, Max Reverse Voltage (DC)=30V, Max Surge Current=600mA, Mount="Surface Mount", Number of Pins=2, Output Current=200mA, Packaging="Tape and Reel", Peak Non-Repetitive Surge Current=600mA, Polarity=Standard, Pricing 1="1=0.24000, 10=0.19900, 100=0.10570, 500=0.06956, 1000=0.04730 (USD)", Radiation Hardening=No, REACH SVHC="No SVHC", Recovery Time=5ns, Reverse Recovery Time=5ns, Reverse Voltage=30V, RoHS=Yes, RoHS Compliant=Yes, Supplier 1=Digi-Key, Voltage Rating (DC)=30V, Width=1.35mm
FB1 FB2 FB3: "Ferrite Beads Multi-Layer Power 600Ohm 25% 100MHz 2A 100mOhm DCR 0805 T/R", Case Code (Imperial)=0805, Case Code (Metric)=2012, Current Rating=2A, DC Resistance (DCR)=100mR, Manufacturer=TDK, Package Quantity=1, Supplier Part Number 1=445-2206-6-ND, Case/Package=0805, Category="Ferrite Beads and Chips", ComponentLink1Description=https://datasheet.ciiva.com/46634/beads-commercial-power-mpz-en-46634377.pdf?src-supplier=Digi-Key, ComponentLink1URL=https://datasheet.ciiva.com/46634/beads-commercial-power-mpz-en-46634377.pdf?src-supplier=Digi-Key, ComponentLink2Description=https://datasheet.ciiva.com/46634/beads-commercial-power-mpz-en-46634606.pdf?src-supplier=Digi-Key, ComponentLink2URL=https://datasheet.ciiva.com/46634/beads-commercial-power-mpz-en-46634606.pdf?src-supplier=Digi-Key, ComponentLink3Description=https://datasheet.ciiva.com/46634/beads-commercial-power-mpz-en-46634335.pdf?src-supplier=Digi-Key, ComponentLink3URL=https://datasheet.ciiva.com/46634/beads-commercial-power-mpz-en-46634335.pdf?src-supplier=Digi-Key, Height=0.041inch, Impedance=600R, Lead Free="Lead Free", Length=0.079inch, Manufacturer Part Number=MPZ2012S601AT000, Max DC Current=2A, Mount="Surface Mount", Packaging="Tape and Reel", Pricing 1="1=0.12000, 10=0.10100, 25=0.09040, 50=0.06640, 100=0.05740, 250=0.04528, 500=0.03824, 1000=0.03221 (USD)", REACH SVHC="No SVHC", RoHS=Yes, RoHS Compliant=Yes, Series=MPZ, Supplier 1=Digi-Key, Width=0.049inch
FID1 FID2 FID3 FID4: "Fisushal 1MM"
J1 J3: library part PPTC081LFBN-RC, "Female, 8C, Straight, .100\"CC; 3.20mm Tail, No Mt. 100u\" Tin; PBT, Phos Bronze, 105 C", Color=Black, Manufacturer=Sullins, Package Quantity=1000, Supplier Part Number 1=S7006-ND, Category=Connectors, ComponentLink1Description=https://media.digikey.com/pdf/Data%20Sheets/Sullins%20PDFs/Female_Headers.100_DS.pdf?src-supplier=Digi-Key, ComponentLink1URL=https://media.digikey.com/pdf/Data%20Sheets/Sullins%20PDFs/Female_Headers.100_DS.pdf?src-supplier=Digi-Key, ComponentLink2Description=http://www.sullinscorp.com/catalogs/78_Page80-81_HEADER_.100_2.54mm_FEMALE.pdf?src-supplier=Future+Electronics, ComponentLink2URL=http://www.sullinscorp.com/catalogs/78_Page80-81_HEADER_.100_2.54mm_FEMALE.pdf?src-supplier=Future+Electronics, Connector Type=Header, Contact Material=Bronze, Contact Plating=Tin, Contact Type="Female Socket", Height=8.5mm, Housing Material=Plastic, Lead Free="Lead Free", Length=20.8mm, Manufacturer Part Number=PPTC081LFBN-RC, Mount="Through Hole", Number of Positions=8, Number of Rows=1, Packaging=Bulk, Pitch=0.1inch, Pricing 1="1=0.65000, 10=0.56500, 400=0.42525, 800=0.36450, 1200=0.33413, 5200=0.29363, 10000=0.29250 (USD)", RoHS=Yes, RoHS Compliant=Yes, Stock 1=119427, Supplier 1=Digi-Key, Termination=Solder, Width=2.5mm
J2: library part M20-7820642, "2.54mm (0.1\") Pitch SIL Vertical PC Tail Socket Assembly, selective gold + tin, 6 contacts", Case/Package=SIL, Color=Black, Contact Resistance=20mR, Manufacturer=Harwin, Max Current Rating=3A, Max Operating Temperature=105°C, Min Operating Temperature=-40°C, Package Quantity=38, Supplier Part Number 1=952-1808-ND, Category="Headers and Wire Housings", ComponentLink1Description=http://www.mouser.com/ds/2/181/Harwin_Product_Catalog_page_197-1134272.pdf?src-supplier=Mouser, ComponentLink1URL=http://www.mouser.com/ds/2/181/Harwin_Product_Catalog_page_197-1134272.pdf?src-supplier=Mouser, ComponentLink2Description=http://components.arrow.com/part/dataview/0323_00725895?src-supplier=Arrow+Europe, ComponentLink2URL=http://components.arrow.com/part/dataview/0323_00725895?src-supplier=Arrow+Europe, ComponentLink3Description=https://cdn.harwin.com/pdfs/M20-782.pdf?src-supplier=Digi-Key, ComponentLink3URL=https://cdn.harwin.com/pdfs/M20-782.pdf?src-supplier=Digi-Key, ComponentLink4Description=http://www.harwin.com/include/downloads/pdfs/60PAGE140.PDF?src-supplier=Avnet, ComponentLink4URL=http://www.harwin.com/include/downloads/pdfs/60PAGE140.PDF?src-supplier=Avnet, Connector Type=Receptacle,Socket, Contact Gender=Female, Contact Material=Bronze, Contact Plating=Gold,Tin, Depth=2.5mm, Gender=Female, Housing Color=Black, Housing Material=Nylon, Length=15.64mm, Manufacturer Part Number=M20-7820642, Mount="Through Hole", Number of Contacts=6, Number of Positions=6, Number of Rows=1, Orientation=Straight, Packaging=Rail/Tube, Pitch=2.54mm, Pricing 1="1=1.20000, 36=0.97222, 108=0.91019, 468=0.74466, 972=0.66192, 4932=0.57918, 9828=0.55160 (USD)", RoHS=Yes, Stock 1=1213, Supplier 1=Digi-Key, Termination=Solder, Weight=0.019048oz
J4: library part M20-7821046, "2.54mm (0.1\") Pitch SIL Vertical PC Tail Socket Assembly, tin, 10 contacts", Case/Package=SIL, Color=Black, Contact Resistance=20mR, Current Rating=3A, Insulation Resistance=1MR, Manufacturer=Harwin, Max Operating Temperature=105°C, Min Operating Temperature=-40°C, Package Quantity=23, Supplier Part Number 1=952-1847-ND, Category="Headers and Wire Housings", ComponentLink1Description=https://datasheet.ciiva.com/26899/getdatasheetpartid-559226-26899379.pdf?src-supplier=Verical, ComponentLink1URL=https://datasheet.ciiva.com/26899/getdatasheetpartid-559226-26899379.pdf?src-supplier=Verical, ComponentLink2Description=https://datasheet.ciiva.com/11753/0900766b80dc1d2b-11753869.pdf?src-supplier=RSComponents, ComponentLink2URL=https://datasheet.ciiva.com/11753/0900766b80dc1d2b-11753869.pdf?src-supplier=RSComponents, ComponentLink3Description=https://datasheet.ciiva.com/6785/m20-782-6785605.pdf?src-supplier=Digi-Key, ComponentLink3URL=https://datasheet.ciiva.com/6785/m20-782-6785605.pdf?src-supplier=Digi-Key, ComponentLink4Description=https://datasheet.ciiva.com/10151/m20-782-10151366.pdf?src-supplier=Avnet, ComponentLink4URL=https://datasheet.ciiva.com/10151/m20-782-10151366.pdf?src-supplier=Avnet, ComponentLink5Description=https://datasheet.ciiva.com/16732/m20-782-16732152.pdf?src-supplier=Avnet+Europe, ComponentLink5URL=https://datasheet.ciiva.com/16732/m20-782-16732152.pdf?src-supplier=Avnet+Europe, Connector Type=Receptacle,Socket, Contact Gender=Female, Contact Material=Bronze, Contact Plating=Tin, Depth=2.5mm, Gender=Receptacle, Hole Diameter=0.8mm, Housing Color=Black, Housing Material=Polyamide, Lead Pitch=2.54mm, Length=25.8mm, Manufacturer Part Number=M20-7821046, Mating Cycles=50, Max Current Rating=3A, Mount="Through Hole", Number of Contacts=10, Number of Positions=10, Number of Rows=1, Orientation=Straight, Packaging=Rail/Tube, Pitch=2.54mm, Pricing 1="1=1.47000, 22=1.24500, 88=1.11807, 440=0.91475, 946=0.81312, 4906=0.71148, 9812=0.67760 (USD)", Radiation Hardening=No, REACH SVHC="No SVHC", RoHS=Yes, Stock 1=1187, Supplier 1=Digi-Key, Termination=Solder
J5 J6: "Conn Unshrouded Header HDR 6 POS 2.54mm Solder ST Top Entry Thru-Hole BergStik® Bulk", Manufacturer=ICC, Supplier Part Number 1=06M1758, Category="Headers and Wire Housings", ComponentLink1Description=http://www.farnell.com/datasheets/1876884.pdf?src-supplier=Newark, ComponentLink1URL=http://www.farnell.com/datasheets/1876884.pdf?src-supplier=Newark, Manufacturer Part Number=67997-106HLF, Pricing 1="1=2.27000, 10=1.89000, 25=1.86000, 50=1.84000, 100=1.82000, 200=0.69900, 250=1.65000, 500=1.53000, 1000=1.33000, 2000=0.69900, 5000=0.69900 (USD)", RoHS=No, Stock 1=9, Supplier 1=Newark
J7: "FCI Right Angle Surface Mount Mount Female USB Connector; 100 V ac; 1.8A", Manufacturer="Amphenol ICC / FCI", Supplier Part Number 1=609-4616-1-ND, Category="USB Connectors", ComponentLink1Description=http://components.arrow.com/part/dataview/0323_04107372?src-supplier=Arrow+Europe, ComponentLink1URL=http://components.arrow.com/part/dataview/0323_04107372?src-supplier=Arrow+Europe, ComponentLink2Description=http://uk.rs-online.com/webdocs/1450/0900766b814507f1.pdf?src-supplier=RSComponents, ComponentLink2URL=http://uk.rs-online.com/webdocs/1450/0900766b814507f1.pdf?src-supplier=RSComponents, ComponentLink3Description=https://cdn.amphenol-icc.com/media/wysiwyg/files/documentation/datasheet/inputoutput/io_usb_micro.pdf?src-supplier=Avnet, ComponentLink3URL=https://cdn.amphenol-icc.com/media/wysiwyg/files/documentation/datasheet/inputoutput/io_usb_micro.pdf?src-supplier=Avnet, ComponentLink4Description=https://cdn.amphenol-icc.com/media/wysiwyg/files/documentation/datasheet/inputoutput/io_usb_micro.pdf?src-supplier=Arrow+Electronics, ComponentLink4URL=https://cdn.amphenol-icc.com/media/wysiwyg/files/documentation/datasheet/inputoutput/io_usb_micro.pdf?src-supplier=Arrow+Electronics, ComponentLink5Description=https://cdn.amphenol-icc.com/media/wysiwyg/files/documentation/datasheet/inputoutput/io_usb_micro.pdf?src-supplier=Onlinecomponents.com, ComponentLink5URL=https://cdn.amphenol-icc.com/media/wysiwyg/files/documentation/datasheet/inputoutput/io_usb_micro.pdf?src-supplier=Onlinecomponents.com, ComponentLink6Description=https://cdn.amphenol-icc.com/media/wysiwyg/files/documentation/datasheet/inputoutput/io_usb_micro.pdf?src-supplier=Verical, ComponentLink6URL=https://cdn.amphenol-icc.com/media/wysiwyg/files/documentation/datasheet/inputoutput/io_usb_micro.pdf?src-supplier=Verical, ComponentLink7Description=http://www.amphenol-icc.com/media/wysiwyg/files/drawing/10118193.pdf?src-supplier=Digi-Key, ComponentLink7URL=http://www.amphenol-icc.com/media/wysiwyg/files/drawing/10118193.pdf?src-supplier=Digi-Key, ComponentLink8Description=https://cdn.amphenol-icc.com/media/wysiwyg/files/documentation/datasheet/inputoutput/io_usb_micro.pdf?src-supplier=Digi-Key, ComponentLink8URL=https://cdn.amphenol-icc.com/media/wysiwyg/files/documentation/datasheet/inputoutput/io_usb_micro.pdf?src-supplier=Digi-Key, ComponentLink9Description=https://cdn.amphenol-icc.com/media/wysiwyg/files/documentation/datasheet/inputoutput/io_usb_micro.pdf?src-supplier=Mouser, ComponentLink9URL=https://cdn.amphenol-icc.com/media/wysiwyg/files/documentation/datasheet/inputoutput/io_usb_micro.pdf?src-supplier=Mouser, ComponentLink10Description=https://cdn.amphenol-icc.com/media/wysiwyg/files/documentation/datasheet/inputoutput/io_usb_micro.pdf?src-supplier=Allied+Electronics, ComponentLink10URL=https://cdn.amphenol-icc.com/media/wysiwyg/files/documentation/datasheet/inputoutput/io_usb_micro.pdf?src-supplier=Allied+Electronics, ComponentLink11Description=https://cdn.amphenol-icc.com/media/wysiwyg/files/documentation/datasheet/inputoutput/io_usb_micro.pdf?src-supplier=RSComponents, ComponentLink11URL=https://cdn.amphenol-icc.com/media/wysiwyg/files/documentation/datasheet/inputoutput/io_usb_micro.pdf?src-supplier=RSComponents, ComponentLink12Description=https://cdn.amphenol-icc.com/media/wysiwyg/files/documentation/datasheet/inputoutput/io_usb_micro.pdf?src-supplier=TTI, ComponentLink12URL=https://cdn.amphenol-icc.com/media/wysiwyg/files/documentation/datasheet/inputoutput/io_usb_micro.pdf?src-supplier=TTI, ComponentLink13Description=https://cdn.amphenol-icc.com/media/wysiwyg/files/documentation/datasheet/inputoutput/io_usb_micro.pdf?src-supplier=TME, ComponentLink13URL=https://cdn.amphenol-icc.com/media/wysiwyg/files/documentation/datasheet/inputoutput/io_usb_micro.pdf?src-supplier=TME, ComponentLink14Description=https://cdn.amphenol-icc.com/media/wysiwyg/files/documentation/datasheet/inputoutput/io_usb_micro.pdf?src-supplier=Heilind+Electronics, ComponentLink14URL=https://cdn.amphenol-icc.com/media/wysiwyg/files/documentation/datasheet/inputoutput/io_usb_micro.pdf?src-supplier=Heilind+Electronics, Manufacturer Part Number=10118193-0001LF, Pricing 1="1=0.48000, 10=0.42000, 25=0.38440, 50=0.36160, 100=0.34660, 250=0.31640, 500=0.30136 (USD)", RoHS=No, Stock 1=101220, Supplier 1=Digi-Key
J8 J9: library part PAD_HOLE_4MM-1.5MM, "A pad with a hole of 1.5 mm. And the pad size 4mm"
JP1 JP4: library part 68000-103HLF, "Conn Unshrouded Header HDR 3 POS 2.54mm Solder ST Top Entry Thru-Hole BergStik® Automotive Bulk", Manufacturer="Amphenol ICC", Supplier Part Number 1=70236888, Category="Headers and Wire Housings", ComponentLink1Description=http://www.farnell.com/cad/1914865.pdf?src-supplier=Farnell, ComponentLink1URL=http://www.farnell.com/cad/1914865.pdf?src-supplier=Farnell, ComponentLink2Description=http://www.farnell.com/cad/1914865.pdf?src-supplier=Element14, ComponentLink2URL=http://www.farnell.com/cad/1914865.pdf?src-supplier=Element14, ComponentLink3Description=http://www.farnell.com/cad/1914865.pdf?src-supplier=Newark, ComponentLink3URL=http://www.farnell.com/cad/1914865.pdf?src-supplier=Newark, ComponentLink4Description=https://cdn.amphenol-icc.com/media/wysiwyg/files/drawing/68000.pdf?src-supplier=Digi-Key, ComponentLink4URL=https://cdn.amphenol-icc.com/media/wysiwyg/files/drawing/68000.pdf?src-supplier=Digi-Key, Manufacturer Part Number=68000-103HLF, RoHS=Yes, RoHS Compliant=Yes, Supplier 1="Allied Electronics"
JP2: library part 68602-204HLF, "Conn Unshrouded Header HDR 4 POS 2.54mm Solder ST Top Entry Thru-Hole BergStik® Bulk", Manufacturer="Amphenol ICC / FCI", Supplier Part Number 1=609-3369-ND, Category=Connectors, ComponentLink1Description=https://cdn.amphenol-icc.com/media/wysiwyg/files/drawing/67996.pdf?src-supplier=Digi-Key, ComponentLink1URL=https://cdn.amphenol-icc.com/media/wysiwyg/files/drawing/67996.pdf?src-supplier=Digi-Key, ComponentLink2Description=https://cdn.amphenol-icc.com/media/wysiwyg/files/drawing/67996.pdf?src-supplier=Avnet, ComponentLink2URL=https://cdn.amphenol-icc.com/media/wysiwyg/files/drawing/67996.pdf?src-supplier=Avnet, ComponentLink3Description=https://cdn.amphenol-icc.com/media/wysiwyg/files/drawing/67996.pdf?src-supplier=Allied+Electronics, ComponentLink3URL=https://cdn.amphenol-icc.com/media/wysiwyg/files/drawing/67996.pdf?src-supplier=Allied+Electronics, ComponentLink4Description=https://cdn.amphenol-icc.com/media/wysiwyg/files/drawing/67996.pdf?src-supplier=Mouser, ComponentLink4URL=https://cdn.amphenol-icc.com/media/wysiwyg/files/drawing/67996.pdf?src-supplier=Mouser, ComponentLink5Description=https://cdn.amphenol-icc.com/media/wysiwyg/files/drawing/67996.pdf?src-supplier=Heilind+Electronics, ComponentLink5URL=https://cdn.amphenol-icc.com/media/wysiwyg/files/drawing/67996.pdf?src-supplier=Heilind+Electronics, Manufacturer Part Number=68602-204HLF, Pricing 1="1=0.34000, 10=0.28700 (USD)", RoHS=No, Stock 1=45, Supplier 1=Digi-Key
JP3: library part 68001-204HLF, "Conn Unshrouded Header HDR 4 POS 2.54mm Solder ST Thru-Hole Bag", Manufacturer="Amphenol ICC / FCI", Supplier Part Number 1=70302499, Category="Headers and Wire Housings", Manufacturer Part Number=68001-204HLF, RoHS=No, Supplier 1="Allied Electronics"
L1: library part L1210R2R2MDWIT, "Inductor RF Chip Wirewound 2.2uH 20% 100KHz 1.13A 0.104Ohm DCR 1210 T/R", Case Code (Imperial)=1210, Case Code (Metric)=3225, Current Rating=2A, DC Current=1.13A, DC Resistance (DCR)=80mR, Inductance=2.2uH, Inductance Tolerance=20%, Manufacturer=KEMET, Max Operating Temperature=105°C, Min Operating Temperature=-40°C, Package Quantity=1000, Resistor Type=Wirewound,Ceramic, Self Resonant Frequency=190MHz, Supplier Part Number 1=399-9598-1-ND, Test Frequency=100kHz, Case/Package=1210, Category="Fixed Inductors", ComponentLink1Description=https://datasheet.ciiva.com/4957/f3115-4957838.pdf?src-supplier=Mouser, ComponentLink1URL=https://datasheet.ciiva.com/4957/f3115-4957838.pdf?src-supplier=Mouser, ComponentLink2Description=https://datasheet.ciiva.com/6691/f3115-6691487.pdf?src-supplier=Digi-Key, ComponentLink2URL=https://datasheet.ciiva.com/6691/f3115-6691487.pdf?src-supplier=Digi-Key, ComponentLink3Description=https://datasheet.ciiva.com/8512/f3115-8512543.pdf?src-supplier=Avnet, ComponentLink3URL=https://datasheet.ciiva.com/8512/f3115-8512543.pdf?src-supplier=Avnet, ComponentLink4Description=https://datasheet.ciiva.com/17280/f3115-17280270.pdf?src-supplier=Avnet+Europe, ComponentLink4URL=https://datasheet.ciiva.com/17280/f3115-17280270.pdf?src-supplier=Avnet+Europe, ComponentLink5Description=https://datasheet.ciiva.com/22685/27262-22685038.pdf?src-supplier=Element14, ComponentLink5URL=https://datasheet.ciiva.com/22685/27262-22685038.pdf?src-supplier=Element14, Core Material=Ferrite, Depth=2.7mm, Height=2.5mm, Height - Seated (Max)=0.106inch, Length=0.126inch, Manufacturer Part Number=L1210R2R2MDWIT, Max DC Current=2A, Military Standard=Not, Mount="Surface Mount", Packaging="Tape and Reel", Pricing 1="1=0.50000, 10=0.43700, 25=0.40600, 50=0.34360, 100=0.31240, 250=0.29364, 500=0.26240 (USD)", Radiation Hardening=No, REACH SVHC="No SVHC", RoHS=Yes, RoHS Compliant=Yes, Series=L-DWI, Shielding=Unshielded, Stock 1=11928, Supplier 1=Digi-Key, Termination=SMD/SMT, Tolerance=20%, Width=0.098inch
MH1 MH2 MH3 MH4: "Mounting Hole plated"